# Altium PCB 2008_SablierElectronique_PCB.PcbDoc (part 2 of 2)
Units mm, origin at the board's own origin, x right, y up, seen from the top; angles counter-clockwise.
Board outline 133.25 x 150.25 mm, 2 copper layers (Top Layer, Bottom Layer), stack 1.586 mm thick; 184 components, 217 nets, 656 pads, 372 vias.
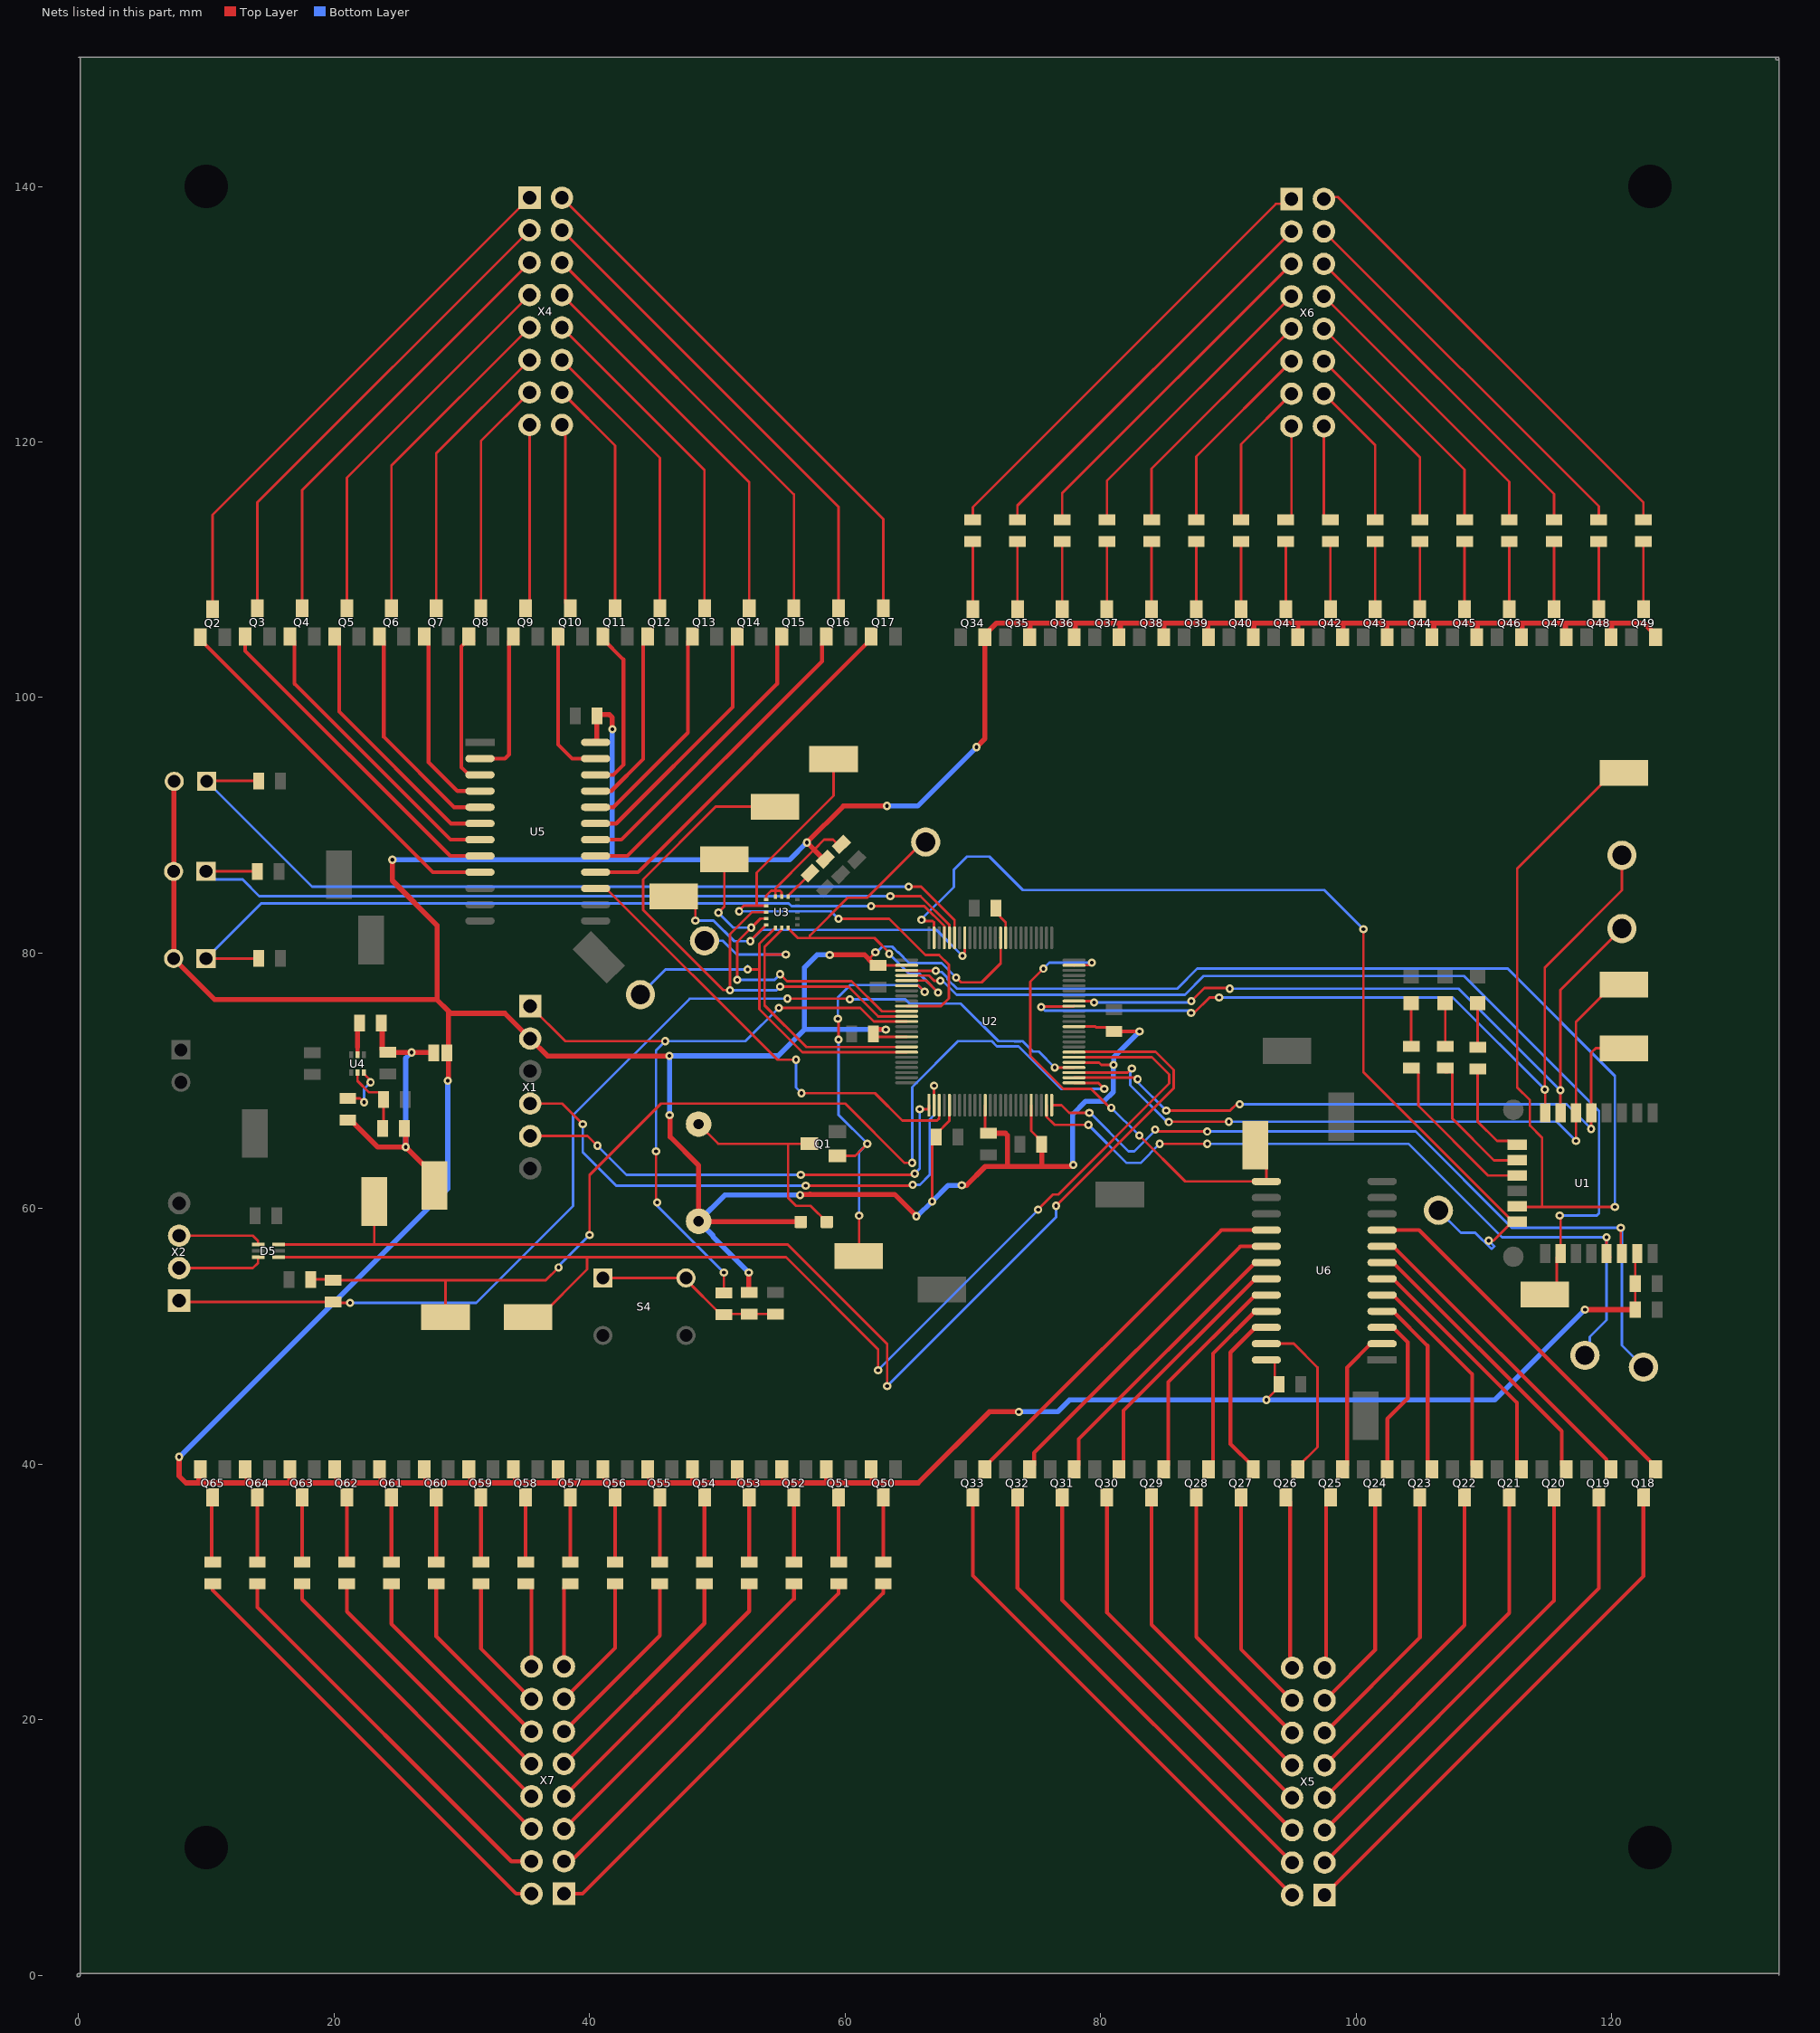
[diagram p2: the nets of this part, all layers, seen from the top]

## Via types
v1: diameter 0.65, hole 0.3, Top Layer to Bottom Layer, tented both sides, 237 vias
v2: diameter 0.65, hole 0.3, Top Layer to Bottom Layer, tented top, 134 vias
v3: diameter 0.65, hole 0.3, Top Layer to Bottom Layer, 1 vias

## Nets (pads, with @x,y where several pads share a name; then routed paths per layer and width w, separated by ;. In a path a pad name is that pad's centre, name@x,y a point inside that pad or via, vN(x,y) a via of type N, cw(c..) or ccw(c..) an arc to the next point about the centre after c; other vN are vias at no path point) (continued)
LB4: TP28.1 U2.74 U6.13 | length 38.1
  Top Layer w0.2: v1(75.526,78.777) 74.507,77.759 74.507,72.19 74.509,72.189 74.509,71.958 77.089,69.378 79.271,69.378 80.755,67.894 v1(80.848,67.894) ; U2.74@77.924,79.046 77.932,79.054 79.115,79.054 79.309,79.248 v1(79.324,79.248) ; v1(83.033,65.721) 86.625,62.128 U6.13@92.983,62.128 92.983,63.55 92.068,64.465 TP28.1@91.95,64.465
  Bottom Layer w0.2: v1(75.526,78.777) 75.997,79.248 v1(79.324,79.248) ; v1(80.848,67.894) 82.956,65.786 82.968,65.786 v1(83.033,65.721)
MatriceON: U2.28 U5.15 | length 36.8
  Top Layer w0.2: U5.15@40.478,85.06 41.305,85.06 54.712,71.653 v1(56.159,71.653) ; v1(56.591,69.037) 62.344,69.037 64.495,66.886 67.212,66.886 67.374,67.048 U2.28@67.374,68.096
  Bottom Layer w0.2: v1(56.159,71.653) 56.159,69.469 v1(56.591,69.037)
NetC1_1: C1.1 U2.85 | length 2.4
  Top Layer w0.2: C1.1@71.731,83.252 72.574,82.409 U2.85@72.574,81.196
NetC3_2: C3.2 U3.14 | length 2.5
  Top Layer w0.2: U3.14@55.55,84.427 55.55,84.477 57.26,86.187 C3.2@57.26,86.252
NetC14_2: C14.2 R9.2 R10.1 S4.1 S4.2 | length 14.7
  Top Layer w0.2: S4.1@41.048,54.574 S4.2@47.405,54.574 ; S4.2@47.548,54.574 47.548,54.451 50.296,51.703 50.408,51.703 50.459,51.753 C14.2@54.559,51.753
NetC16_2: C16.2 J1.2 L1.1 R11.1 R12.1 TP21.1 | length 24.6
  Top Layer w0.4: R11.1@21.082,66.938 21.307,66.938 23.425,64.82 v1(25.615,64.82) ; L1.1@23.71,74.529 23.767,74.472 23.767,72.449 23.992,72.224 C16.2@24.217,72.224 v1(26.063,72.224) 27.656,72.224 J1.2@27.686,72.194 ; R12.1@25.488,66.264 25.713,66.039 25.615,65.941 v1(25.615,64.82) ; TP21.1@27.858,61.816 27.858,62.577 v1(25.615,64.82)
  Bottom Layer w0.4: v1(25.615,64.82) 25.615,71.776 v1(26.063,72.224)
NetD1_2: D1.2 R1.2 | length 3.4
  Top Layer w0.2: R1.2@109.525,72.63 D1.2@109.525,76.069
NetD2_2: D2.2 R2.2 | length 3.4
  Top Layer w0.2: R2.2@106.985,72.698 D2.2@106.985,76.069
NetD3_2: D3.2 R3.2 | length 3.4
  Top Layer w0.2: R3.2@104.322,72.698 D3.2@104.322,76.069
NetD4_A: D4.A LS1.N Q1.3 | length 17.3
  Top Layer w0.2: LS1.N@48.539,66.614 50.079,65.075 55.55,65.075 ; Q1.3@57.205,65.075 55.55,65.075 ; D4.A@58.576,58.955 58.566,58.955 57.298,60.223 56.159,60.223 55.55,60.833 55.55,65.075
NetD5_1: D5.1 TP19.1 U2.56 | length 99.5
  Top Layer w0.2: D5.1@15.664,56.193 39.814,56.193 ; TP19.1@35.185,51.499 36.07,51.499 39.814,55.243 39.814,56.193 ; v1(62.586,47.346) 62.586,48.994 55.387,56.193 39.814,56.193 ; v1(75.117,59.919) 75.117,59.931 76.286,61.1 76.696,61.1 85.38,69.784 85.38,70.504 84.036,71.848 77.926,71.848 U2.56@77.924,71.846
  Bottom Layer w0.2: v1(62.586,47.346) 75.117,59.877 v1(75.117,59.919)
NetD5_3: D5.3 TP20.1 U2.57 | length 100
  Top Layer w0.2: D5.3@15.664,57.193 23.146,57.193 ; TP20.1@23.146,60.554 23.146,57.193 ; v1(63.297,46.105) 63.297,49.403 55.507,57.193 23.146,57.193 ; v1(76.529,60.223) 76.533,60.223 85.73,69.421 85.73,70.857 84.311,72.276 77.969,72.276 77.932,72.238 U2.57@77.924,72.246
  Bottom Layer w0.2: v1(63.297,46.105) 76.529,59.337 v1(76.529,60.223)
NetD5_4: D5.4 X2.3 | length 6.6
  Top Layer w0.2: X2.3@7.874,57.882 13.646,57.882 14.054,57.474 D5.4@14.054,57.193
NetD5_6: D5.6 X2.2 | length 6.8
  Top Layer w0.2: X2.2@7.874,55.342 13.646,55.342 14.054,55.75 D5.6@14.054,56.193
NetL1_2: L1.2 U4.2 | length 2.3
  Top Layer w0.3: U4.2@21.844,72.047 21.844,72.644
  Top Layer w0.4: 21.844,72.644 L1.2@21.844,74.323
NetQ1_1: Q1.1 TP9.1 U2.6 | length 33.2
  Top Layer w0.2: Q1.1@59.405,64.125 60.798,64.125 v1(61.747,65.075) ; v1(59.436,74.854) 59.487,74.803 v1(59.487,73.228) ; TP9.1@61.08,56.296 61.106,56.322 v1(61.106,59.448) ; U2.6@64.824,77.446 64.832,77.438 65.767,77.438 v1(66.243,76.962)
  Bottom Layer w0.2: v1(59.436,74.854) 59.436,76.513 60.423,77.499 65.681,77.499 66.218,76.962 v1(66.243,76.962) ; v1(59.487,73.228) 59.487,67.335 v1(61.747,65.075) 61.106,64.433 v1(61.106,59.448)
NetQ2_1: Q2.1 U5.9 | length 29.6
  Top Layer w0.3: Q2.1@9.55,104.72 9.55,104.52 27.74,86.33 U5.9@31.422,86.33
NetQ2_3: Q2.3 X4.1 | length 42.5
  Top Layer w0.2: Q2.3@10.5,106.92 10.5,114.31 X4.1@35.306,139.116
NetQ3_1: Q3.1 U5.8 | length 26.2
  Top Layer w0.3: Q3.1@13.05,104.781 13.05,103.646 29.096,87.6 U5.8@31.422,87.6
NetQ3_3: Q3.3 X4.2 | length 38.4
  Top Layer w0.2: Q3.3@14,106.981 14,115.27 X4.2@35.306,136.576
NetQ4_1: Q4.1 U5.7 | length 23.6
  Top Layer w0.3: Q4.1@16.55,104.581 Q4.1@16.55,104.781 16.9,104.431 16.9,101.083 29.113,88.87 U5.7@31.422,88.87
NetQ4_3: Q4.3 X4.3 | length 34.4
  Top Layer w0.2: Q4.3@17.5,106.981 17.5,116.23 X4.3@35.306,134.036
NetQ5_1: Q5.1 U5.6 | length 20.9
  Top Layer w0.3: Q5.1@20.05,104.581 Q5.1@20.05,104.781 20.15,104.681 20.4,104.431 20.4,98.889 29.149,90.14 U5.6@31.422,90.14
NetQ5_3: Q5.3 X4.4 | length 30.4
  Top Layer w0.2: Q5.3@21,106.981 21,117.19 X4.4@35.306,131.496
NetQ6_1: Q6.1 U5.5 | length 17.8
  Top Layer w0.3: Q6.1@23.55,104.781 23.9,104.431 23.9,96.906 29.396,91.41 U5.5@31.422,91.41
NetQ6_3: Q6.3 X4.5 | length 26.5
  Top Layer w0.2: Q6.3@24.5,106.981 24.5,118.15 X4.5@35.306,128.956
NetQ7_1: Q7.1 U5.4 | length 14.9
  Top Layer w0.3: Q7.1@27.05,104.781 27.4,104.431 27.4,94.937 29.657,92.68 U5.4@31.422,92.68
NetQ7_3: Q7.3 X4.6 | length 22.5
  Top Layer w0.2: Q7.3@28,106.981 28,119.11 X4.6@35.306,126.416
NetQ8_1: Q8.1 U5.3 | length 12.7
  Top Layer w0.3: Q8.1@30.9,104.431 30.65,104.681 Q8.1@30.55,104.781 30.55,104.581 29.973,104.004 29.973,94.533 30.557,93.95 U5.3@31.422,93.95
NetQ8_3: Q8.3 X4.7 | length 18.5
  Top Layer w0.2: Q8.3@31.5,106.981 31.5,120.07 X4.7@35.306,123.876
NetQ9_1: Q9.1 U5.2 | length 12.3
  Top Layer w0.3: U5.2@31.422,95.22 33.383,95.22 33.7,95.536 33.7,104.431 Q9.1@34.05,104.781 Q9.1@34.4,104.431
NetQ9_3: Q9.3 X4.8 | length 14.5
  Top Layer w0.2: Q9.3@35,106.981 35.306,107.287 X4.8@35.306,121.336
NetQ10_1: Q10.1 U5.23 | length 12.1
  Top Layer w0.3: U5.23@40.478,95.22 38.643,95.22 37.541,96.322 37.541,104.572 Q10.1@37.55,104.581 ; Q10.1@37.55,104.581 37.65,104.681 Q10.1@37.55,104.781 Q10.1@37.55,104.581
NetQ10_3: Q10.3 X4.9 | length 14.6
  Top Layer w0.2: X4.9@37.846,121.336 38.1,121.082 38.1,107.381 Q10.3@38.5,106.981
NetQ11_1: Q11.1 U5.22 | length 13.2
  Top Layer w0.3: U5.22@40.478,93.95 41.869,93.95 42.65,94.731 42.65,102.981 41.05,104.581 Q11.1@41.05,104.781
NetQ11_3: Q11.3 X4.10 | length 18.6
  Top Layer w0.2: X4.10@37.846,123.876 42,119.722 Q11.3@42,106.981
NetQ12_1: Q12.1 U5.21 | length 14.5
  Top Layer w0.3: U5.21@40.478,92.68 41.698,92.68 44.2,95.182 44.2,104.431 Q12.1@44.55,104.781
NetQ12_3: Q12.3 X4.11 | length 22.6
  Top Layer w0.2: X4.11@37.846,126.416 45.5,118.762 Q12.3@45.5,106.981
NetQ13_1: Q13.1 U5.20 | length 17.3
  Top Layer w0.3: U5.20@40.478,91.41 41.855,91.41 47.7,97.255 47.7,104.431 Q13.1@48.05,104.781
NetQ13_3: Q13.3 X4.12 | length 26.6
  Top Layer w0.2: X4.12@37.846,128.956 49,117.802 Q13.3@49,106.981
NetQ14_1: Q14.1 U5.19 | length 20.2
  Top Layer w0.3: U5.19@40.478,90.14 42.087,90.14 51.2,99.253 51.2,104.431 Q14.1@51.55,104.781
NetQ14_3: Q14.3 X4.13 | length 30.6
  Top Layer w0.2: X4.13@37.846,131.496 52.5,116.842 Q14.3@52.5,106.981
NetQ15_1: Q15.1 U5.18 | length 23.1
  Top Layer w0.3: U5.18@40.478,88.87 42.488,88.87 54.7,101.082 54.7,104.431 Q15.1@55.05,104.781
NetQ15_3: Q15.3 X4.14 | length 34.6
  Top Layer w0.2: X4.14@37.846,134.036 56,115.882 Q15.3@56,106.981
NetQ16_1: Q16.1 U5.17 | length 26.1
  Top Layer w0.3: U5.17@40.478,87.6 42.968,87.6 58.2,102.832 58.2,104.231 58.55,104.581 Q16.1@58.55,104.781
NetQ16_3: Q16.3 X4.15 | length 38.6
  Top Layer w0.2: X4.15@37.846,136.576 59.5,114.922 Q16.3@59.5,106.981
NetQ17_1: Q17.1 U5.16 | length 29.3
  Top Layer w0.3: U5.16@40.478,86.33 43.799,86.33 62.05,104.581 Q17.1@62.05,104.781
NetQ17_3: Q17.3 X4.16 | length 42.6
  Top Layer w0.2: X4.16@37.846,139.116 63,113.962 Q17.3@63,106.981
NetQ18_1: Q18.1 U6.9 | length 29.3
  Top Layer w0.3: U6.9@102.039,58.318 104.932,58.318 123.45,39.8 Q18.1@123.45,39.6
NetQ18_3: Q18.3 X5.1 | length 41.5
  Top Layer w0.3: X5.1@97.54,6.277 122.5,31.237 Q18.3@122.5,37.4
NetQ19_1: Q19.1 U6.8 | length 25.4
  Top Layer w0.3: U6.8@102.039,57.048 102.904,57.048 119.6,40.352 119.6,39.95 Q19.1@119.95,39.6
NetQ19_3: Q19.3 X5.2 | length 37.5
  Top Layer w0.3: X5.2@97.54,8.817 119,30.277 Q19.3@119,37.4
NetQ20_1: Q20.1 U6.7 | length 22.7
  Top Layer w0.3: U6.7@102.039,55.778 102.904,55.778 116.1,42.582 116.1,39.95 Q20.1@116.45,39.6
NetQ20_3: Q20.3 X5.3 | length 33.5
  Top Layer w0.3: X5.3@97.54,11.357 115.5,29.317 Q20.3@115.5,37.4
NetQ21_1: Q21.1 U6.6 | length 19.9
  Top Layer w0.3: U6.6@102.039,54.508 102.904,54.508 112.6,44.812 112.6,39.95 Q21.1@112.95,39.6
NetQ21_3: Q21.3 X5.4 | length 29.5
  Top Layer w0.3: X5.4@97.54,13.897 112,28.357 Q21.3@112,37.4
NetQ22_1: Q22.1 U6.5 | length 17.2
  Top Layer w0.3: U6.5@102.039,53.238 102.904,53.238 109.1,47.042 109.1,39.95 Q22.1@109.45,39.6
NetQ22_3: Q22.3 X5.5 | length 25.5
  Top Layer w0.3: X5.5@97.54,16.437 108.5,27.397 Q22.3@108.5,37.4
NetQ23_1: Q23.1 U6.4 | length 14.5
  Top Layer w0.3: U6.4@102.039,51.968 102.904,51.968 105.6,49.272 105.6,39.95 Q23.1@105.95,39.6
NetQ23_3: Q23.3 X5.6 | length 21.5
  Top Layer w0.3: X5.6@97.54,18.977 105,26.437 Q23.3@105,37.4
NetQ24_1: Q24.1 U6.3 | length 13.1
  Top Layer w0.3: U6.3@102.039,50.698 102.904,50.698 104.05,49.552 104.05,45.147 102.45,43.547 Q24.1@102.45,39.6
NetQ24_3: Q24.3 X5.7 | length 17.5
  Top Layer w0.3: X5.7@97.54,21.517 101.5,25.477 Q24.3@101.5,37.4
NetQ25_1: Q25.1 U6.2 | length 11.6
  Top Layer w0.3: Q25.1@98.95,39.6 99.3,39.95 99.3,47.555 101.173,49.428 U6.2@102.039,49.428
NetQ25_3: Q25.3 X5.8 | length 13.5
  Top Layer w0.3: X5.8@97.54,24.057 97.65,24.167 97.65,37.05 Q25.3@98,37.4
NetQ26_1: Q26.1 U6.23 | length 13.9
  Top Layer w0.2: U6.23@92.983,49.428 95.123,49.428 96.977,47.574 96.977,41.327 95.45,39.8 Q26.1@95.45,39.6
  Top Layer w0.3: Q26.1@95.1,39.95 Q26.1@95.45,39.6
NetQ26_3: Q26.3 X5.9 | length 13.6
  Top Layer w0.3: Q26.3@94.5,37.4 94.85,37.05 94.85,24.207 X5.9@95,24.057
NetQ27_1: Q27.1 U6.22 | length 13.5
  Top Layer w0.3: Q27.1@91.95,39.6 91.95,39.8 90.17,41.58 90.17,48.751 92.117,50.698 U6.22@92.983,50.698
NetQ27_3: Q27.3 X5.10 | length 17.5
  Top Layer w0.3: Q27.3@91,37.4 91,25.517 X5.10@95,21.517
NetQ28_1: Q28.1 U6.21 | length 14.8
  Top Layer w0.3: Q28.1@88.45,39.6 88.8,39.95 88.8,48.651 92.117,51.968 U6.21@92.983,51.968
NetQ28_3: Q28.3 X5.11 | length 21.5
  Top Layer w0.3: Q28.3@87.5,37.4 87.5,26.477 X5.11@95,18.977
NetQ29_1: Q29.1 U6.20 | length 17.5
  Top Layer w0.3: Q29.1@84.95,39.6 85.3,39.95 85.3,46.421 92.117,53.238 U6.20@92.983,53.238
NetQ29_3: Q29.3 X5.12 | length 25.5
  Top Layer w0.3: Q29.3@84,37.4 84,27.437 X5.12@95,16.437
NetQ30_1: Q30.1 U6.19 | length 20.2
  Top Layer w0.3: Q30.1@81.45,39.6 81.8,39.95 81.8,44.191 92.117,54.508 U6.19@92.983,54.508
NetQ30_3: Q30.3 X5.13 | length 29.5
  Top Layer w0.3: Q30.3@80.5,37.4 80.5,28.397 X5.13@95,13.897
NetQ31_1: Q31.1 U6.18 | length 22.9
  Top Layer w0.3: Q31.1@77.95,39.6 78.3,39.95 78.3,41.961 92.117,55.778 U6.18@92.983,55.778
NetQ31_3: Q31.3 X5.14 | length 33.5
  Top Layer w0.3: Q31.3@77,37.4 77,29.357 X5.14@95,11.357
NetQ32_1: Q32.1 U6.17 | length 26.3
  Top Layer w0.3: Q32.1@74.45,39.6 74.8,39.95 74.8,40.891 90.957,57.048 U6.17@92.983,57.048
NetQ32_3: Q32.3 X5.15 | length 37.5
  Top Layer w0.3: Q32.3@73.5,37.4 73.5,30.317 X5.15@95,8.817
NetQ33_1: Q33.1 U6.16 | length 29.9
  Top Layer w0.3: Q33.1@70.95,39.6 70.95,39.8 89.468,58.318 U6.16@92.983,58.318
NetQ33_3: Q33.3 X5.16 | length 41.5
  Top Layer w0.3: Q33.3@70,37.4 70,31.277 X5.16@95,6.277
NetQ34_3: Q34.3 R14.2 | length 5.3
  Top Layer w0.2: Q34.3@70,106.92 R14.2@70,112.22
NetQ35_3: Q35.3 R15.2 | length 5.3
  Top Layer w0.2: Q35.3@73.5,106.92 R15.2@73.5,112.22
NetQ36_3: Q36.3 R16.2 | length 5.3
  Top Layer w0.2: Q36.3@77,106.92 R16.2@77,112.22
NetQ37_3: Q37.3 R17.2 | length 5.3
  Top Layer w0.2: Q37.3@80.5,106.92 R17.2@80.5,112.22
NetQ38_3: Q38.3 R18.2 | length 5.3
  Top Layer w0.2: Q38.3@84,106.92 R18.2@84,112.22
NetQ39_3: Q39.3 R19.2 | length 5.3
  Top Layer w0.2: Q39.3@87.5,106.92 R19.2@87.5,112.22
NetQ40_3: Q40.3 R20.2 | length 5.3
  Top Layer w0.2: Q40.3@91,106.92 R20.2@91,112.22
NetQ41_3: Q41.3 R21.2 | length 5.3
  Top Layer w0.2: Q41.3@94.5,106.92 R21.2@94.5,112.22
NetQ42_3: Q42.3 R22.2 | length 5.3
  Top Layer w0.2: Q42.3@98,106.92 R22.2@98,112.22
NetQ43_3: Q43.3 R23.2 | length 5.3
  Top Layer w0.2: Q43.3@101.5,106.92 R23.2@101.5,112.22
NetQ44_3: Q44.3 R24.2 | length 5.3
  Top Layer w0.2: Q44.3@105,106.92 R24.2@105,112.22
NetQ45_3: Q45.3 R25.2 | length 5.3
  Top Layer w0.2: Q45.3@108.5,106.92 R25.2@108.5,112.22
NetQ46_3: Q46.3 R26.2 | length 5.3
  Top Layer w0.2: Q46.3@112,106.92 R26.2@112,112.22
NetQ47_3: Q47.3 R27.2 | length 5.3
  Top Layer w0.2: Q47.3@115.5,106.92 R27.2@115.5,112.22
NetQ48_3: Q48.3 R28.2 | length 5.3
  Top Layer w0.2: Q48.3@119,106.92 R28.2@119,112.22
NetQ49_3: Q49.3 R29.2 | length 5.3
  Top Layer w0.2: Q49.3@122.5,106.92 R29.2@122.5,112.22
NetQ50_3: Q50.3 R30.2 | length 5.1
  Top Layer w0.3: R30.2@63,32.35 Q50.3@63,37.4
NetQ51_3: Q51.3 R31.2 | length 5.1
  Top Layer w0.3: R31.2@59.5,32.35 Q51.3@59.5,37.4
NetQ52_3: Q52.3 R32.2 | length 5.1
  Top Layer w0.3: R32.2@56,32.35 Q52.3@56,37.4
NetQ53_3: Q53.3 R33.2 | length 5.1
  Top Layer w0.3: R33.2@52.5,32.35 Q53.3@52.5,37.4
NetQ54_3: Q54.3 R34.2 | length 5.1
  Top Layer w0.3: R34.2@49,32.35 Q54.3@49,37.4
NetQ55_3: Q55.3 R35.2 | length 5.1
  Top Layer w0.3: R35.2@45.5,32.35 Q55.3@45.5,37.4
NetQ56_3: Q56.3 R36.2 | length 5.1
  Top Layer w0.3: R36.2@42,32.35 Q56.3@42,37.4
NetQ57_3: Q57.3 R37.2 | length 5.1
  Top Layer w0.3: R37.2@38.5,32.35 Q57.3@38.5,37.4
NetQ58_3: Q58.3 R38.2 | length 5.1
  Top Layer w0.3: R38.2@35,32.35 Q58.3@35,37.4
NetQ59_3: Q59.3 R39.2 | length 5.1
  Top Layer w0.3: R39.2@31.5,32.35 Q59.3@31.5,37.4
NetQ60_3: Q60.3 R40.2 | length 5.1
  Top Layer w0.3: R40.2@28,32.35 Q60.3@28,37.4
NetQ61_3: Q61.3 R41.2 | length 5.1
  Top Layer w0.3: R41.2@24.5,32.35 Q61.3@24.5,37.4
NetQ62_3: Q62.3 R42.2 | length 5.1
  Top Layer w0.3: R42.2@21,32.35 Q62.3@21,37.4
NetQ63_3: Q63.3 R43.2 | length 5.1
  Top Layer w0.3: R43.2@17.5,32.35 Q63.3@17.5,37.4
NetQ64_3: Q64.3 R44.2 | length 5.1
  Top Layer w0.3: R44.2@14,32.35 Q64.3@14,37.4
NetQ65_3: Q65.3 R45.2 | length 5.1
  Top Layer w0.3: R45.2@10.5,32.35 10.418,32.432 10.418,37.084 10.5,37.166 Q65.3@10.5,37.4
NetR1_1: R1.1 U1.10 | length 8
  Top Layer w0.2: R1.1@109.525,70.93 109.525,66.808 111.045,65.288 111.965,65.288 112.265,64.988 U1.10@112.615,64.988
NetR2_1: R2.1 U1.11 | length 11
  Top Layer w0.2: R2.1@106.985,70.681 R2.1@107.21,70.681 ; R2.1@106.985,70.998 107.21,70.998 107.535,70.673 107.535,67.049 110.796,63.788 U1.11@112.615,63.788
NetR3_1: R3.1 U1.12 | length 13.3
  Top Layer w0.2: R3.1@104.322,70.998 104.547,70.998 104.872,70.673 104.872,68.051 110.335,62.588 U1.12@112.615,62.588
NetR4_1: R4.1 R5.1 TP18.1 U2.51 | length 87.1
  Top Layer w0.2: R5.1@18.173,54.458 19.875,54.458 R4.1@19.939,54.393 28.65,54.393 ; TP18.1@28.727,51.499 28.727,54.316 28.65,54.393 ; v1(37.572,55.396) 36.57,54.393 28.65,54.393 ; v1(40,57.937) 40,62.627 45.598,68.224 60.014,68.224 64.662,63.576 v1(65.253,63.576) ; U2.51@77.916,69.854 U2.51@77.924,69.846 77.932,69.838 79.829,69.838 80.29,69.378 v1(80.294,69.378)
  Bottom Layer w0.2: v1(37.572,55.396) 37.572,55.51 v1(40,57.937) ; v1(65.253,63.576) 65.253,69.52 68.834,73.101 71.485,73.101 71.891,72.695 73.584,72.695 76.902,69.378 v1(80.294,69.378)
NetR6_1: R6.1 S2.1 U2.96 | length 64.6
  Top Layer w0.2: S2.1@10.16,86.33 10.224,86.393 R6.1@14,86.393 ; v1(63.551,84.455) 65.913,84.455 68.166,82.202 68.166,81.204 U2.96@68.174,81.196
  Bottom Layer w0.2: S2.1@10.16,86.33 10.735,85.755 12.848,85.755 14.148,84.455 v1(63.551,84.455)
NetR7_1: R7.1 S3.1 U2.97 | length 65.3
  Top Layer w0.2: S3.1@9.982,79.574 R7.1@14.1,79.574 ; v1(62.047,83.671) 66.202,83.671 67.766,82.107 67.766,81.204 U2.97@67.774,81.196
  Bottom Layer w0.2: S3.1@9.982,79.574 14.303,83.895 55.581,83.895 55.805,83.671 v1(62.047,83.671)
NetR8_1: R8.1 S1.1 U2.95 | length 68.5
  Top Layer w0.2: S1.1@10.033,93.442 10.063,93.472 R8.1@14.1,93.472 ; v1(64.973,85.192) 65.955,85.192 68.574,82.573 U2.95@68.574,81.196
  Bottom Layer w0.2: S1.1@10.033,93.442 18.283,85.192 v1(64.973,85.192)
NetR10_2: R10.2 U2.13 X1.1 | length 54.3
  Top Layer w0.2: X1.1@35.357,75.844 38.1,73.101 v1(45.923,73.101) ; v1(45.212,64.491) 45.212,60.554 v1(45.288,60.477) ; R10.2@50.521,53.403 v1(50.521,54.991) ; v1(54.813,75.717) 61.189,75.717 62.26,74.646 U2.13@64.824,74.646
  Bottom Layer w0.2: v1(45.212,64.491) 45.212,72.39 v1(45.923,73.101) 52.197,73.101 v1(54.813,75.717) ; v1(45.288,60.477) 45.288,60.223 v1(50.521,54.991)
NetR11_2: R11.2 U4.6 | length 4.1
  Top Layer w0.2: R11.2@21.082,68.638 22.032,68.638 22.344,68.326 v1(22.352,68.326) ; U4.6@22.344,70.644 22.344,70.542 22.732,70.154 22.732,70.138 22.86,70.01 v1(22.86,69.888)
  Bottom Layer w0.2: v1(22.352,68.326) 22.352,69.38 v1(22.86,69.888)
NetR12_2: R12.2 R13.1 U4.5 | length 5.7
  Top Layer w0.2: U4.5@21.844,70.644 21.844,69.988 22.732,69.1 23.551,69.1 23.876,68.775 R13.1@23.876,68.55 23.876,66.352 R12.2@23.788,66.264
NetTP1_1: TP1.1 U2.10 U3.2 | length 41.1
  Top Layer w0.2: v1(51.714,83.261) 51.714,83.337 52.079,83.702 53.079,83.702 ; U3.2@53.825,83.702 53.079,83.702 ; TP1.1@59.389,94.893 TP1.1@59.1,95.182 59.1,92.323 53.079,86.302 53.079,83.702 ; v1(59.5,82.689) 63.465,82.689 66.3,79.855 67.365,79.855 68.132,79.088 68.132,76.463 67.515,75.846 U2.10@64.824,75.846
  Bottom Layer w0.2: v1(51.714,83.261) 58.904,83.261 59.476,82.689 v1(59.5,82.689)
NetTP2_1: TP2.1 U2.12 U3.3 | length 47.3
  Top Layer w0.2: v1(51.005,77.094) v1@50.989,77.109 ; U3.3@53.825,83.202 52.722,83.202 50.989,81.469 v1@50.989,77.109 ; TP2.1@54.519,91.452 49.883,91.452 44.2,85.769 44.2,83.376 50.467,77.109 v1@50.989,77.109 ; v1(54.916,77.371) 60.272,77.371 62.597,75.046 U2.12@64.824,75.046
  Bottom Layer w0.2: v1(51.005,77.094) 54.639,77.094 v1(54.916,77.371)
NetTP3_1: TP3.1 U2.11 U3.4 | length 28.1
  Top Layer w0.2: v1(50.087,83.16) 50.557,83.63 TP3.1@50.557,87.342 ; v1(51.564,77.909) 51.564,80.882 53.384,82.702 U3.4@53.825,82.702 ; v1(54.916,78.343) 55.455,77.804 60.524,77.804 62.882,75.446 U2.11@64.824,75.446
  Bottom Layer w0.2: v1(50.087,83.16) 51.255,81.991 v1(52.654,81.991) ; v1(51.564,77.909) 54.483,77.909 v1(54.916,78.343)
NetTP4_1: TP4.1 U2.93 U3.5 | length 27.2
  Top Layer w0.2: v1@48.26,82.55 v1(48.285,82.55) 48.285,83.668 TP4.1@48.311,83.693 ; v1(52.588,80.925) 52.588,80.965 U3.5@53.825,82.202 ; v1(69.19,79.781) 69.19,79.903 69.366,80.08 69.366,81.188 U2.93@69.374,81.196
  Bottom Layer w0.2: v1(48.285,82.55) 49.708,82.55 51.333,80.925 v1(52.588,80.925) 53.477,81.813 67.158,81.813 v1(69.19,79.781)
NetTP5_1: TP5.1 U1.6 U2.53 | length 57
  Top Layer w0.2: U2.53@77.924,70.646 82.127,70.646 v1(82.448,70.968) ; v1(85.349,66.776) 85.38,66.807 v1(90.043,66.807) ; v1(117.221,65.303) 117.221,67.482 U1.6@117.215,67.488 117.215,74.603 120.155,77.543 TP5.1@120.981,77.543
  Bottom Layer w0.2: v1(82.448,70.968) 82.331,70.85 82.331,69.663 85.217,66.776 v1(85.349,66.776) ; v1(90.043,66.807) 115.717,66.807 v1(117.221,65.303)
NetTP6_1: TP6.1 U1.5 U2.52 | length 51.8
  Top Layer w0.2: U2.52@77.924,70.246 77.929,70.251 82.784,70.251 v1(82.906,70.129) ; v1(85.141,67.666) 90.136,67.666 90.713,68.242 90.899,68.056 v1(90.899,68.169) v1@90.906,68.169 ; v1(118.415,66.243) 118.415,72.191 118.774,72.55 TP6.1@120.981,72.55 TP6.1@121.153,72.55
  Bottom Layer w0.2: v1(82.906,70.129) 82.906,69.901 v1(85.141,67.666) ; v1(90.899,68.169) 116.489,68.169 v1(118.415,66.243)
NetTP7_1: TP7.1 U1.14 U2.3 | length 117
  Top Layer w0.2: U2.3@64.824,78.646 64.854,78.616 67.104,78.616 v1(67.107,78.613) ; U1.14@112.615,60.188 112.651,60.223 112.753,60.122 114.561,60.122 ; v1(120.269,60.122) 114.561,60.122 ; TP7.1@120.981,94.099 120.096,94.099 112.615,86.619 112.615,69.477 113.614,68.478 113.614,66.497 114.561,65.551 114.561,60.122
  Bottom Layer w0.2: v1(67.107,78.613) 67.193,78.527 67.565,78.527 68.028,78.064 68.028,77.945 68.757,77.216 86.009,77.216 87.57,78.777 111.875,78.777 120.269,70.383 v1(120.269,60.122)
NetTP8_1: TP8.1 U1.18 U2.4 | length 77.7
  Top Layer w0.2: U2.4@64.824,78.246 64.832,78.238 66.567,78.238 66.98,77.826 v1(67.453,77.826) ; TP8.1@114.783,53.273 114.8,53.273 115.715,54.188 115.715,56.188 U1.18@116.015,56.488 116.015,59.397 v1(115.951,59.461)
  Bottom Layer w0.2: v1(67.453,77.826) 67.647,77.826 68.739,76.733 86.601,76.733 88.075,78.207 108.458,78.207 119.024,67.64 119.024,59.639 118.847,59.461 v1(115.951,59.461)
NetTP10_1: TP10.1 U1.7 U2.67 | length 58.3
  Top Layer w0.2: U2.67@77.924,76.246 77.932,76.238 79.387,76.238 v1(79.502,76.124) ; v1(87.117,76.246) 88.138,77.267 90.068,77.267 v1(90.119,77.216) ; U1.7@116.015,67.488 116.002,67.501 v1(116.002,69.266) 116.002,77.105 TP10.1@120.815,81.919
  Bottom Layer w0.2: v1(79.502,76.124) 86.995,76.124 v1(87.117,76.246) ; v1(90.119,77.216) 108.026,77.216 115.926,69.317 115.951,69.317 v1(116.002,69.266)
NetTP11_1: TP11.1 U1.8 U2.66 | length 68.4
  Top Layer w0.2: v1(75.347,75.779) 75.384,75.816 77.894,75.816 U2.66@77.924,75.846 ; v1(87.097,75.311) 87.325,75.311 88.544,76.53 v1(89.281,76.53) ; U1.8@114.815,67.488 114.815,69.284 v1(114.783,69.317) 114.783,78.876 120.815,84.909 TP11.1@120.815,87.655
  Bottom Layer w0.2: v1(75.347,75.779) 75.637,75.489 86.919,75.489 v1(87.097,75.311) ; v1(89.281,76.53) 107.569,76.53 v1(114.783,69.317)
NetTP12_1: TP12.1 U1.15 U2.99 | length 78.9
  Top Layer w0.2: v1(65.989,82.601) 66.075,82.515 66.864,82.515 66.966,82.412 66.966,81.204 U2.99@66.974,81.196 ; v1(100.584,81.864) 100.584,70.669 U1.15@112.265,58.988 ; v1(110.388,57.49) 110.768,57.49 U1.15@112.265,58.988 ; U1.15@112.44,58.988 U1.15@112.265,58.988
  Bottom Layer w0.2: v1(65.989,82.601) 65.938,82.601 68.51,85.173 68.51,86.519 69.545,87.554 71.298,87.554 73.923,84.928 97.52,84.928 v1(100.584,81.864) ; TP12.1@106.451,59.867 108.203,58.115 109.322,58.115 110.571,56.865 110.647,56.865 110.83,57.048 v1(110.388,57.49)
NetTP13_1: TP13.1 U1.22 U2.50 | length 64
  Top Layer w0.2: U2.50@76.174,68.096 76.938,68.096 77.546,67.488 v1(79.121,67.488) ; v1(84.277,66.192) 84.438,66.032 v1(88.358,66.032) ; v1(120.726,58.496) 120.726,56.577 U1.22@120.815,56.488
  Bottom Layer w0.2: v1(79.121,67.488) 79.197,67.488 82.195,64.489 82.651,64.489 84.277,66.116 v1(84.277,66.192) ; v1(88.358,66.032) 104.656,66.032 112.192,58.496 v1(120.726,58.496) 120.812,58.41 120.812,49.287 TP13.1@122.5,47.6 ; TP13.1@122.586,47.856 TP13.1@122.842,47.6
NetTP14_1: TP14.1 U1.21 U2.49 | length 61.5
  Top Layer w0.2: U2.49@75.774,68.096 75.782,68.088 75.782,67.185 76.41,66.557 v1(79.055,66.557) ; v1(84.633,65.075) v1(88.358,65.075) ; v1(119.615,57.76) U1.21@119.615,56.488 U1.21@119.913,56.19
  Bottom Layer w0.2: v1(79.055,66.557) 82.035,63.576 83.134,63.576 v1(84.633,65.075) ; v1(88.358,65.075) 104.115,65.075 111.43,57.76 v1(119.615,57.76) 119.615,51.289 118.291,49.965 118.291,48.892 TP14.1@117.921,48.522
NetTP15_1: TP15.1 U2.5 U3.8 | length 28.2
  Top Layer w0.2: U3.8@55.55,81.977 55.55,81.927 56.298,81.178 57.25,81.178 ; v1(63.449,79.934) 63.449,80.035 62.306,81.178 57.25,81.178 ; U2.5@64.824,77.846 66.35,77.846 v1(67.285,76.911) ; TP15.1@65.657,88.257 61.731,84.331 60.198,84.331 57.25,81.383 57.25,81.178
  Bottom Layer w0.2: v1(63.449,79.934) 65.004,78.379 65.816,78.379 v1(67.285,76.911)
NetTP16_1: TP16.1 U2.18 U3.7 | length 27.6
  Top Layer w0.2: U3.7@55.05,81.977 55.05,81.823 53.709,80.482 53.709,79.91 ; v1(55.364,79.887) 53.733,79.887 53.709,79.91 ; U2.18@64.824,72.646 56.97,72.646 53.709,75.907 53.709,79.91
  Bottom Layer w0.2: TP16.1@48.997,80.965 50.44,80.965 51.518,79.887 v1(55.364,79.887)
NetTP17_1: TP17.1 U2.19 U3.6 | length 30.2
  Top Layer w0.2: v1(52.375,78.715) 53.3,78.715 ; U3.6@54.55,81.977 53.3,80.727 53.3,78.715 ; U2.19@64.824,72.246 56.659,72.246 53.3,75.605 53.3,78.715
  Bottom Layer w0.2: TP17.1@43.983,76.751 45.946,78.715 v1(52.375,78.715) 52.375,78.991 v1@52.372,78.994
NetU2_26: U2.26 X1.5 | length 37.7
  Top Layer w0.2: X1.5@35.357,65.684 39.853,65.684 v1(40.615,64.922) ; v1(56.536,62.636) 65.354,62.636 v1(65.456,62.738) ; v1@65.852,67.727 v1(65.852,67.769) 66.556,67.769 66.574,67.787 U2.26@66.574,68.096
  Bottom Layer w0.2: v1(40.615,64.922) 42.901,62.636 v1(56.536,62.636) ; v1(65.456,62.738) 65.852,63.134 v1(65.852,67.769)
NetU2_27: U2.27 X1.4 | length 44.2
  Top Layer w0.2: X1.4@35.357,68.224 37.861,68.224 v1(39.472,66.614) ; v1(56.921,61.791) 65.223,61.791 v1(65.303,61.871) ; U2.27@66.974,68.096 v1(66.974,69.618)
  Bottom Layer w0.2: v1(39.472,66.614) 39.472,64.414 42.095,61.791 v1(56.921,61.791) ; v1(65.303,61.871) 65.859,61.871 66.624,62.636 66.624,66.964 66.974,67.314 v1(66.974,69.618)
OutBC1: R30.1 X7.1 | length 35.5
  Top Layer w0.3: X7.1@38,6.38 39.46,6.38 63,29.92 R30.1@63,30.65
OutBC2: R31.1 X7.2 | length 30.9
  Top Layer w0.3: X7.2@38,8.92 38.536,8.92 59.5,29.884 R31.1@59.5,30.65
OutBC3: R32.1 X7.3 | length 26.6
  Top Layer w0.3: X7.3@38,11.46 56,29.46 R32.1@56,30.65
OutBC4: R33.1 X7.4 | length 22.7
  Top Layer w0.3: X7.4@38,14 52.5,28.5 R33.1@52.5,30.65
OutBC5: R34.1 X7.5 | length 18.7
  Top Layer w0.3: X7.5@38,16.54 49,27.54 R34.1@49,30.65
OutBC6: R35.1 X7.6 | length 14.7
  Top Layer w0.3: X7.6@38,19.08 45.5,26.58 R35.1@45.5,30.65
OutBC7: R36.1 X7.7 | length 10.7
  Top Layer w0.3: X7.7@38,21.62 42,25.62 R36.1@42,30.65
OutBC8: R37.1 X7.8 | length 6.8
  Top Layer w0.3: X7.8@38,24.16 38,30.375 38.275,30.65 R37.1@38.5,30.65
OutBC9: R38.1 X7.9 | length 6.8
  Top Layer w0.3: R38.1@35,30.65 35.185,30.65 35.46,30.375 X7.9@35.46,24.16
OutBC10: R39.1 X7.10 | length 10.7
  Top Layer w0.3: R39.1@31.5,30.65 31.5,25.58 X7.10@35.46,21.62
OutBC11: R40.1 X7.11 | length 14.7
  Top Layer w0.3: R40.1@28,30.65 28,26.54 X7.11@35.46,19.08
OutBC12: R41.1 X7.12 | length 18.6
  Top Layer w0.3: R41.1@24.5,30.65 24.5,27.5 X7.12@35.46,16.54
OutBC13: R42.1 X7.13 | length 22.6
  Top Layer w0.3: R42.1@21,30.65 21,28.46 X7.13@35.46,14
OutBC14: R43.1 X7.14 | length 26.6
  Top Layer w0.3: R43.1@17.5,30.65 17.5,29.42 X7.14@35.46,11.46
OutBC15: R44.1 X7.15 | length 31.5
  Top Layer w0.3: R44.1@14,30.65 14,28.799 33.879,8.92 X7.15@35.46,8.92
OutBC16: R45.1 X7.16 | length 35.3
  Top Layer w0.3: R45.1@10.5,30.65 10.5,30.14 34.26,6.38 X7.16@35.46,6.38
OutC1: R14.1 X6.1 | length 35.9
  Top Layer w0.2: R14.1@70,113.92 70,114.907 93.726,138.633 94.564,138.633 X6.1@94.945,139.014
OutC2: R15.1 X6.2 | length 31.4
  Top Layer w0.2: R15.1@73.5,113.92 73.5,115.029 X6.2@94.945,136.474
OutC3: R16.1 X6.3 | length 27.4
  Top Layer w0.2: R16.1@77,113.92 77,115.989 X6.3@94.945,133.934
OutC4: R17.1 X6.4 | length 23.5
  Top Layer w0.2: R17.1@80.5,113.92 80.5,116.949 X6.4@94.945,131.394
OutC5: R18.1 X6.5 | length 19.5
  Top Layer w0.2: R18.1@84,113.92 84,117.909 X6.5@94.945,128.854
OutC6: R19.1 X6.6 | length 15.5
  Top Layer w0.2: R19.1@87.5,113.92 87.5,118.869 X6.6@94.945,126.314
OutC7: R20.1 X6.7 | length 11.5
  Top Layer w0.2: R20.1@91,113.92 91,119.829 X6.7@94.945,123.774
OutC8: R21.1 X6.8 | length 7.6
  Top Layer w0.2: R21.1@94.5,113.92 94.62,113.92 94.945,114.245 X6.8@94.945,121.234
OutC9: R22.1 X6.9 | length 7.6
  Top Layer w0.2: X6.9@97.485,121.234 97.485,114.245 97.81,113.92 R22.1@98,113.92
OutC10: R23.1 X6.10 | length 11.5
  Top Layer w0.2: X6.10@97.485,123.774 101.5,119.759 R23.1@101.5,113.92
OutC11: R24.1 X6.11 | length 15.5
  Top Layer w0.2: X6.11@97.485,126.314 105,118.799 R24.1@105,113.92
OutC12: R25.1 X6.12 | length 19.5
  Top Layer w0.2: X6.12@97.485,128.854 108.5,117.839 R25.1@108.5,113.92
OutC13: R26.1 X6.13 | length 23.5
  Top Layer w0.2: X6.13@97.485,131.394 112,116.879 R26.1@112,113.92
OutC14: R27.1 X6.14 | length 27.5
  Top Layer w0.2: X6.14@97.485,133.934 115.5,115.919 R27.1@115.5,113.92
OutC15: R28.1 X6.15 | length 31.5
  Top Layer w0.2: X6.15@97.485,136.474 119,114.959 R28.1@119,113.92
OutC16: R29.1 X6.16 | length 36.3
  Top Layer w0.2: X6.16@97.485,139.014 97.638,139.167 98.577,139.167 122.5,115.244 R29.1@122.5,113.92
VBUS: R4.2 U2.54 X2.1 | length 86.4
  Top Layer w0.2: X2.1@7.874,52.802 7.983,52.693 R4.2@19.939,52.693 20.003,52.629 v1(21.26,52.629) ; v1(55.499,76.429) 60.325,76.429 v1(60.376,76.378) ; v1(76.41,71.046) U2.54@77.924,71.046
  Bottom Layer w0.2: v1(21.26,52.629) 31.14,52.629 38.71,60.198 38.71,67.305 47.833,76.429 v1(55.499,76.429) ; v1(60.376,76.378) 64.719,76.378 65.049,76.048 69.063,76.048 72.009,73.101 73.253,73.101 73.269,73.085 73.746,73.085 73.762,73.101 73.914,73.101 74.727,72.288 75.167,72.288 v1(76.41,71.046)
VCC: C2.2 C5.2 C6.2 C7.2 C8.2 C9.2 C10.2 C11.2 C12.2 C13.2 C17.2 C18.2 D4.C J1.1 LS1.P Q34.2 Q35.2 Q36.2 Q37.2 Q38.2 Q39.2 Q40.2 Q41.2 Q42.2 Q43.2 Q44.2 Q45.2 Q46.2 Q47.2 Q48.2 Q49.2 Q50.2 Q51.2 Q52.2 Q53.2 Q54.2 Q55.2 Q56.2 Q57.2 Q58.2 Q59.2 Q60.2 Q61.2 Q62.2 Q63.2 Q64.2 Q65.2 R9.1 S1.2 S2.2 S3.2 U1.23 U2.2 U2.16 U2.30 U2.37 U2.46 U2.55 U2.62 U2.86 U3.1 U3.15 U3.16 U5.24 U6.24 X1.2 | length 567
  Top Layer w0.2: S2.2@7.353,86.305 S2.2@7.442,86.393 S2.2@7.379,86.457 ; S3.2@7.442,79.574 S3.2@7.531,79.662 ; U3.1@53.825,84.202 53.825,84.497 54.215,84.887 54.55,84.887 ; U3.16@54.55,84.427 54.55,84.887 ; 54.55,84.902 54.55,85.06 57.095,87.605 57.579,88.089 ; U3.15@55.05,84.427 55.025,84.452 55.025,84.77 54.908,84.887 54.55,84.887 ; D4.C@56.477,59.014 D4.C@56.536,58.955 ; 57.581,88.087 58.368,88.873 59.058,88.873 59.424,88.507 C12.2@59.719,88.507 ; C11.2@58.326,87.342 C11.2@58.454,87.342 ; 61.857,79.535 v1(62.382,80.061) ; C7.2@62.203,73.66 62.417,73.446 U2.16@64.824,73.446 ; C10.2@62.586,79.031 62.6,79.046 U2.2@64.824,79.046 U2.2@64.816,79.054 ; v1(66.821,60.566) 66.821,65.297 C6.2@67.134,65.61 67.134,65.835 68.174,66.875 U2.30@68.174,68.096 ; v1(68.707,78.08) 69.079,77.708 70.697,77.708 72.182,79.192 72.182,81.188 U2.86@72.174,81.196 ; C8.2@70.974,65.969 C8.2@71.044,65.899 ; U2.37@70.982,68.104 U2.37@70.974,68.096 70.974,66.147 C8.2@71.222,65.899 ; U2.46@74.574,68.096 74.574,66.074 75.399,65.249 C5.2@75.399,65.137 ; U2.55@77.924,71.446 77.954,71.416 79.892,71.416 80.061,71.247 v1(81.026,71.247) ; U2.62@77.924,74.246 79.58,74.246 79.636,74.19 80.726,74.19 C9.2@81.051,73.865 ; v1(92.989,45.03) 92.989,45.05 93.968,46.028 C18.2@93.968,46.253 93.643,46.578 93.643,47.989 93.474,48.158 U6.24@92.983,48.158 U6.24@92.989,48.152 ; C2.2@121.857,52.091 C13.2@121.857,54.123 121.857,55.997 U1.23@122.015,56.155
  Top Layer w0.3: C9.2@81.051,73.865 81.052,73.864 83.057,73.864 v1(83.058,73.863)
  Top Layer w0.4: S3.2@7.442,79.574 10.663,76.352 28.062,76.352 ; S1.2@7.493,93.442 7.468,93.417 7.468,79.726 S3.2@7.531,79.662 ; v1(7.874,40.569) 7.874,39.074 8.416,38.532 9.417,38.532 ; Q65.2@9.55,39.6 9.417,39.467 9.417,38.532 ; Q64.2@13.05,39.6 13.2,39.6 13.2,38.532 ; Q63.2@16.55,39.6 16.55,38.532 ; Q62.2@20.05,39.6 20.2,39.45 20.2,38.532 ; Q61.2@23.55,39.6 23.7,39.45 23.7,38.532 ; v1(24.562,87.3) 24.562,85.674 28.062,82.174 28.062,76.352 ; Q60.2@27.05,39.6 27.2,39.45 27.2,38.532 ; v1(28.903,70.01) 28.956,70.063 28.956,75.459 ; Q59.2@30.55,39.6 30.7,39.45 30.7,38.532 ; Q58.2@34.05,39.6 34.2,39.45 34.2,38.532 ; Q57.2@37.55,39.6 37.605,39.545 37.605,38.532 ; U5.24@40.212,96.495 40.284,96.567 40.361,96.49 U5.24@40.478,96.49 40.499,96.49 40.576,96.567 C17.2@40.576,98.552 40.694,98.67 41.549,98.67 41.783,98.436 v3(41.783,97.511) ; Q56.2@41.05,39.6 41.2,39.45 41.2,38.532 ; Q55.2@44.55,39.6 44.7,39.45 44.7,38.532 ; v1(46.257,71.947) 36.714,71.947 X1.2@35.357,73.304 33.376,75.286 29.129,75.286 28.956,75.459 ; v1(46.266,67.314) 46.313,67.266 46.313,65.61 48.539,63.383 LS1.P@48.539,59.014 48.569,58.984 56.447,58.984 D4.C@56.477,59.014 ; Q54.2@48.05,39.6 48.064,39.586 48.064,38.532 ; Q53.2@51.55,39.6 51.7,39.45 51.7,38.532 ; v1(52.47,54.991) 52.47,53.483 R9.1@52.5,53.453 ; Q52.2@55.05,39.6 55.2,39.45 55.2,38.532 ; v1(56.49,61.062) 56.544,61.116 57.201,61.116 57.223,61.138 57.277,61.138 57.302,61.112 63.871,61.112 v1(65.573,59.411) ; C11.2@58.326,87.342 57.581,88.087 57.579,88.089 v1(57.014,88.654) 59.871,91.511 v1(63.284,91.511) ; Q51.2@58.55,39.6 58.562,39.588 58.562,38.532 ; v1(58.8,79.858) 61.534,79.858 61.857,79.535 ; C10.2@61.947,79.444 62.361,79.031 C10.2@62.586,79.031 ; Q50.2@62.05,39.6 62.131,39.519 62.131,38.532 ; C7.2@62.203,73.66 62.203,73.791 62.428,74.016 v1(63.195,74.016) ; v1(66.821,60.566) v1@66.885,60.63 ; v1(69.139,61.824) 69.512,61.824 70.985,63.297 72.72,63.297 ; v1(70.294,96.114) 70.95,96.77 Q34.2@70.95,104.72 70.95,104.92 71.846,105.816 74.472,105.816 ; C8.2@71.222,65.899 72.556,65.899 72.72,65.735 72.72,63.297 ; v1(73.609,44.099) 71.302,44.099 65.735,38.532 62.131,38.532 ; Q35.2@74.45,104.72 74.472,104.742 74.472,105.816 ; C5.2@75.399,65.137 C5.2@75.399,65.024 75.399,63.31 75.413,63.297 ; v1(77.876,63.424) 77.749,63.297 75.413,63.297 ; Q36.2@77.95,104.72 78.004,104.774 78.004,105.816 ; Q37.2@81.45,104.72 81.555,104.825 81.555,105.816 ; Q38.2@84.95,104.72 84.963,104.733 84.963,105.816 ; Q39.2@88.45,104.72 88.392,104.778 88.392,105.816 ; Q40.2@91.95,104.72 91.998,104.768 91.998,105.816 ; Q41.2@95.45,104.72 95.453,104.723 95.453,105.816 ; Q42.2@98.95,104.72 98.997,104.767 98.997,105.816 ; Q43.2@102.45,104.72 102.429,104.741 102.429,105.816 ; Q44.2@105.95,104.72 106.09,104.86 106.09,105.816 ; Q45.2@109.45,104.72 109.485,104.755 109.485,105.816 ; Q46.2@112.95,104.72 113.015,104.785 113.015,105.816 ; Q47.2@116.45,104.72 116.383,104.787 116.383,105.816 ; v1(117.921,52.091) C2.2@121.857,52.091 ; Q48.2@119.95,104.72 120,104.77 120,105.816 ; Q49.2@123.45,104.72 123.45,104.92 122.554,105.816 120,105.816 ; 9.417,38.532 13.2,38.532 ; 13.2,38.532 16.55,38.532 ; 16.55,38.532 20.2,38.532 ; 20.2,38.532 23.7,38.532 ; 23.7,38.532 27.2,38.532 ; 27.2,38.532 30.7,38.532 ; 28.062,76.352 28.956,75.459 ; 30.7,38.532 34.2,38.532 ; 34.2,38.532 37.605,38.532 ; 37.605,38.532 41.2,38.532 ; 41.2,38.532 44.7,38.532 ; 44.7,38.532 48.064,38.532 ; 48.064,38.532 51.7,38.532 ; 51.7,38.532 55.2,38.532 ; 55.2,38.532 58.562,38.532 ; 58.562,38.532 62.131,38.532 ; 72.72,63.297 75.413,63.297 ; 74.472,105.816 78.004,105.816 ; 78.004,105.816 81.555,105.816 ; 81.555,105.816 84.963,105.816 ; 84.963,105.816 88.392,105.816 ; 88.392,105.816 91.998,105.816 ; 91.998,105.816 95.453,105.816 ; 95.453,105.816 98.997,105.816 ; 98.997,105.816 102.429,105.816 ; 102.429,105.816 106.09,105.816 ; 106.09,105.816 109.485,105.816 ; 109.485,105.816 113.015,105.816 ; 113.015,105.816 116.383,105.816 ; 116.383,105.816 120,105.816
  Bottom Layer w0.2: v1(62.382,80.061) 62.484,80.061 62.932,80.509 63.687,80.509 64.135,80.061 64.186,80.061 65.024,79.223 67.564,79.223 v1(68.707,78.08)
  Bottom Layer w0.4: v1(7.874,40.569) 7.909,40.569 28.903,61.563 v1(28.903,70.01) ; v1(24.562,87.3) 41.783,87.3 ; v3(41.783,97.511) 41.783,87.3 ; v1(46.266,67.314) 46.261,67.318 46.261,71.943 v1(46.257,71.947) 46.268,71.958 54.763,71.958 56.823,74.018 ; v1(52.47,54.991) 49.671,57.79 49.671,57.883 LS1.P@48.539,59.014 50.587,61.062 v1(56.49,61.062) ; v1(57.014,88.654) 55.66,87.3 41.783,87.3 ; v1(58.8,79.858) 57.81,79.858 56.823,78.87 56.823,74.018 ; v1(63.195,74.016) 63.144,74.016 63.142,74.018 56.823,74.018 ; v1(63.284,91.511) 65.691,91.511 v1(70.294,96.114) ; v1(65.573,59.411) 65.659,59.411 66.815,60.566 v1(66.821,60.566) 68.078,61.824 v1(69.139,61.824) ; v1(73.609,44.099) 76.644,44.099 77.575,45.03 v1(92.989,45.03) 110.861,45.03 v1(117.921,52.091) ; v1(77.876,63.424) 77.826,63.475 77.826,67.386 78.842,68.402 80.273,68.402 81.001,69.129 81.001,71.222 v1(81.026,71.247) 81.026,71.831 v1(83.058,73.863)
pads on no net: U1.2 U1.3 U1.4 U1.13 U1.17 U1.19 U1.20 U2.1 U2.7 U2.8 U2.9 U2.14 U2.20 U2.21 U2.39 U2.40 U2.87 U2.88 U2.89 U2.90 U2.98 U2.100 X1.6

## Polygon pours and split planes (outlines as drawn)
GND on Top Layer "Top Layer-GND" (solid, remove dead copper, pour order 0): 7.544,109.689 124.714,109.693 124.714,35.408 124.714,33.061 131.136,33.061 3.501,33.061 3.501,109.845 3.679,110.023 3.908,109.795 7.406,109.693
GND on Bottom Layer "Bottom Layer-GND" (solid, remove dead copper, pour order 4): 7.696,110.019 124.308,109.959 124.308,33.324 3.594,33.324 3.594,110.108 3.772,110.286 4,110.057 7.404,110.057

## Silkscreen, mask and mechanical layers (free items; w line width, h text height)
Top Overlay:
  text "ETML-ES" at 53.487,140.539 h4
  text "2008_1_A" at 53.512,134.089 h3
Board Outline (ES):
  lines w0.254: 0,0 0,150 133,150 133,0 0,0

## Text inside footprints (layer, text, board x,y; h text height)
LS1: Top Overlay "+" at 52.539,57.544 h1.27 r180; Top Overlay "-" at 52.5,69.28 h1.27 r180; Components Bodies "+" at 52.539,57.544 h1.27 r180; Components Bodies "-" at 52.539,68.804 h1.27 r180